# Altium PCB SH-C30A-V1.21.PcbDoc
Units mil, origin at the board's own origin, x right, y up, seen from the top; angles counter-clockwise.
Board outline 3227.33 x 1515.75 mil, 2 copper layers (Top Layer, Bottom Layer), stack 62.206 mil thick; 33 components, 25 nets, 132 pads, 54 vias.
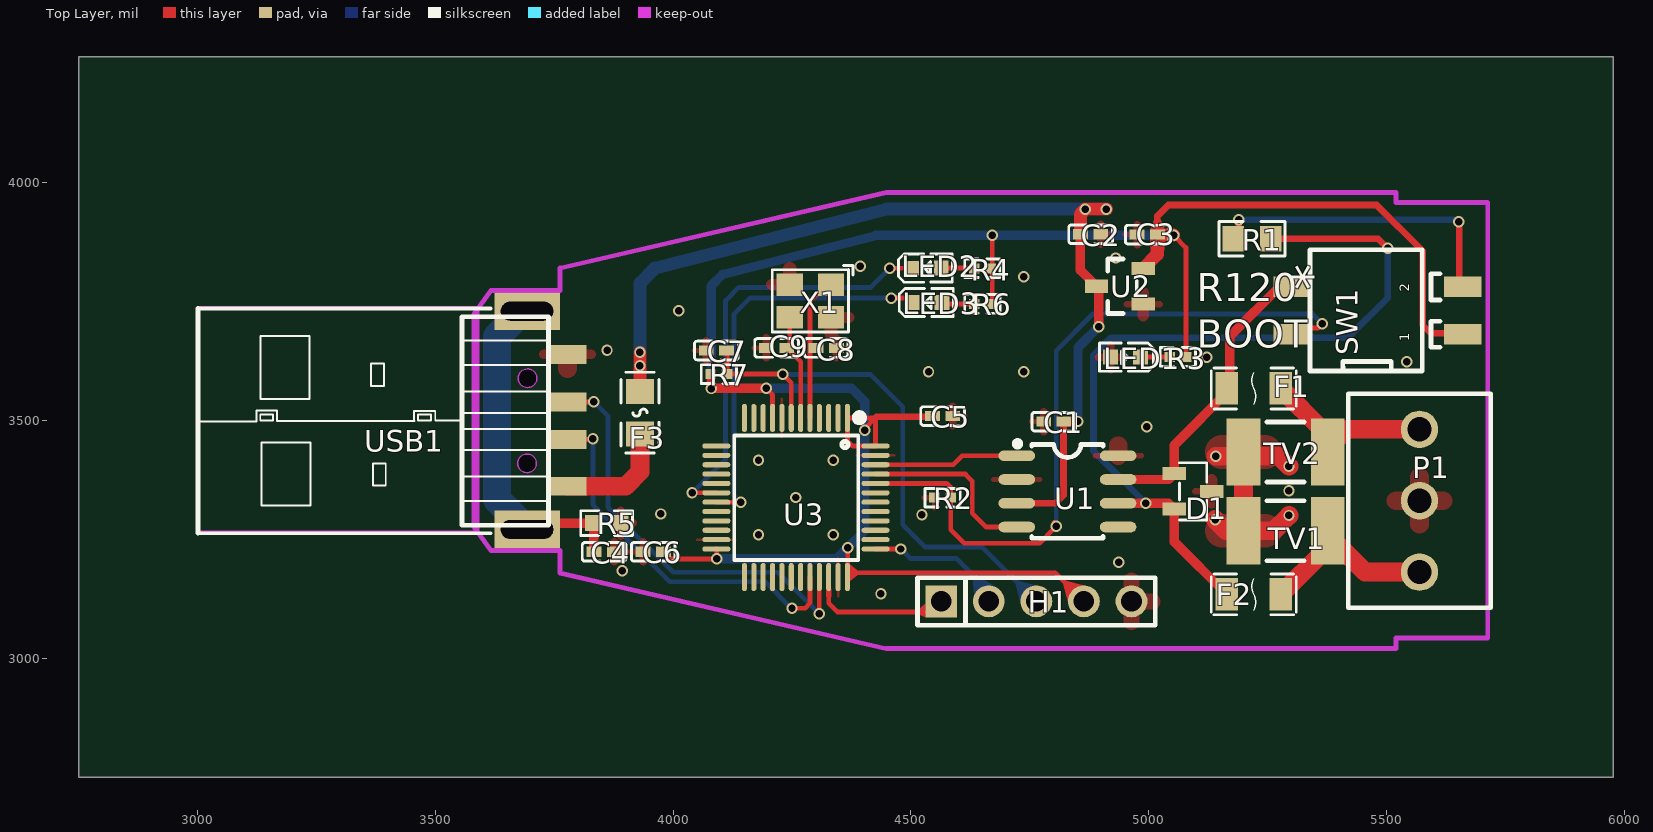
[diagram p0: Top Layer view]
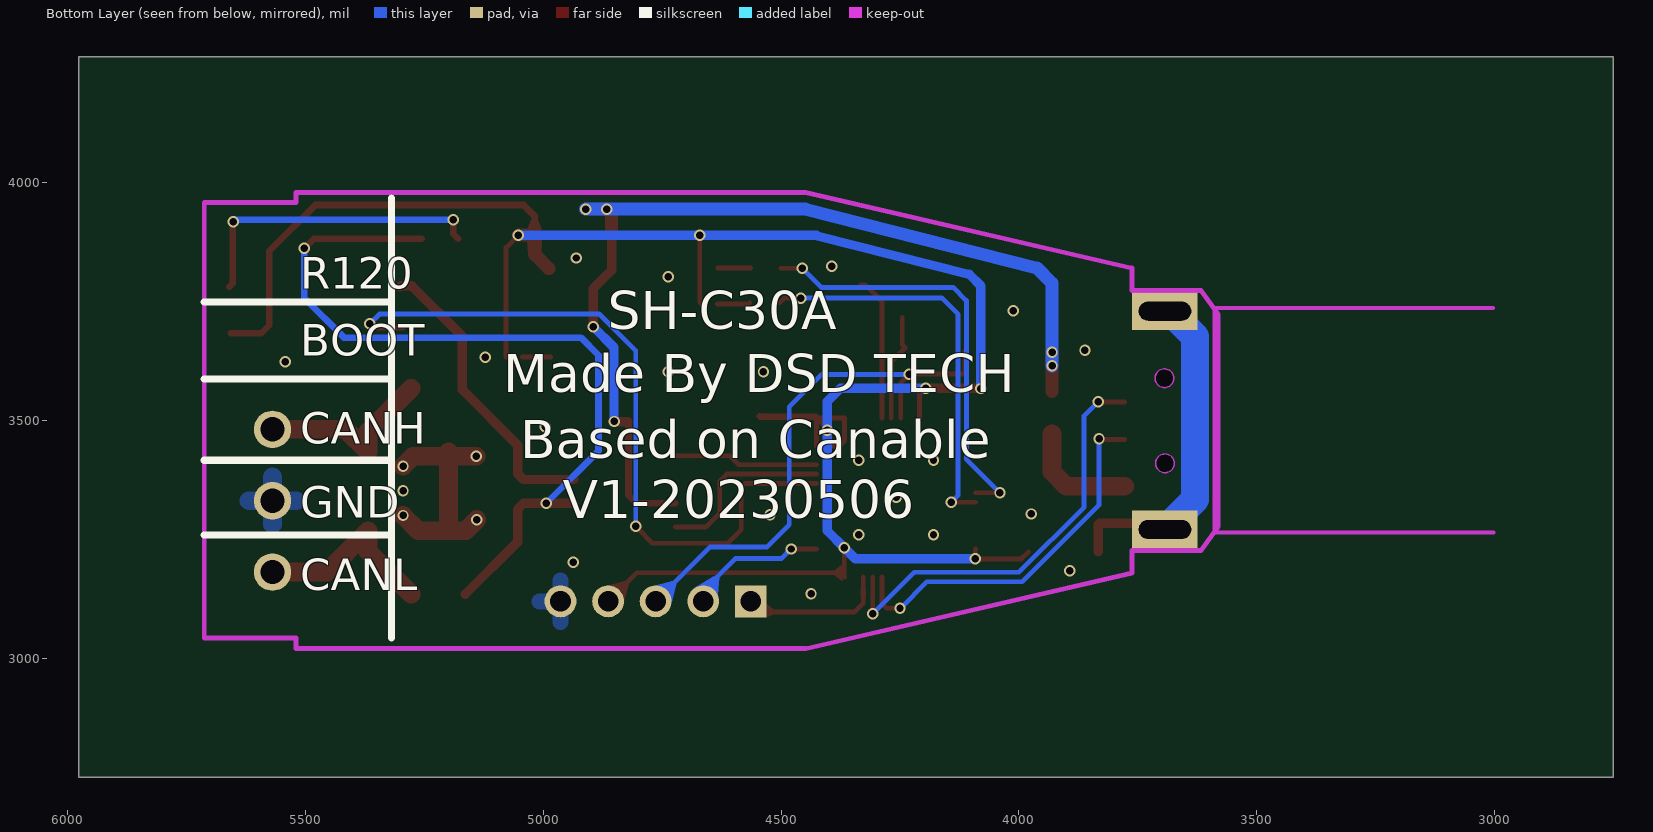
[diagram p1: Bottom Layer view, seen from below]

## Layer stack, top to bottom
Top Solder Mask Layer: solder mask 0.394, Dk 3.3
Top Layer: signal copper 1.379
Dielectric1: surface 59.449, FR4, Dk 4.5
Bottom Layer: signal copper 1.378
Bottom Solder Mask Layer: solder mask 0.394, Dk 3.3

## Board outline
5977.33,2750 2750,2750 2750,4265.75 5977.33,4265.75

## Design rules (kind name [scope] priority, off if disabled: settings)
BoardOutlineClearance Default [All] p0: genericclearance=10 ignorepadtopadclearanceinfootprint=FALSE except(0: Arc-SplitContinuation Track-SplitContinuation SMDPad-SplitContinuation THPad-SplitContinuation Via-SplitContinuation Fill-SplitContinuation Poly-SplitContinuation Region-SplitContinuation Text-SplitContinuation)
BoardOutlineClearance Plane_Default [All] p0: genericclearance=10 ignorepadtopadclearanceinfootprint=FALSE except(0: Arc-SplitContinuation Track-SplitContinuation SMDPad-SplitContinuation THPad-SplitContinuation Via-SplitContinuation Fill-SplitContinuation Poly-SplitContinuation Region-SplitContinuation Text-SplitContinuation)
BoardOutlineClearance Copper_gge7917 [All] p0: genericclearance=10 ignorepadtopadclearanceinfootprint=FALSE except(0: Arc-SplitContinuation Track-SplitContinuation SMDPad-SplitContinuation THPad-SplitContinuation Via-SplitContinuation Fill-SplitContinuation Poly-SplitContinuation Region-SplitContinuation Text-SplitContinuation)
BoardOutlineClearance Copper_gge7914 [All] p0: genericclearance=10 ignorepadtopadclearanceinfootprint=FALSE except(0: Arc-SplitContinuation Track-SplitContinuation SMDPad-SplitContinuation THPad-SplitContinuation Via-SplitContinuation Fill-SplitContinuation Poly-SplitContinuation Region-SplitContinuation Text-SplitContinuation)
BoardOutlineClearance otherClearance [All] p0: genericclearance=10 ignorepadtopadclearanceinfootprint=FALSE except(0: Arc-SplitContinuation Track-SplitContinuation SMDPad-SplitContinuation THPad-SplitContinuation Via-SplitContinuation Fill-SplitContinuation Poly-SplitContinuation Region-SplitContinuation Text-SplitContinuation)
Clearance Default [All] p1: gap=7 ignorepadtopadclearanceinfootprint=FALSE
Clearance Plane_Default [All] p1: gap=7 ignorepadtopadclearanceinfootprint=FALSE
Clearance Copper_gge7917 [All] p1: gap=7 ignorepadtopadclearanceinfootprint=FALSE
Clearance Copper_gge7914 [All] p1: gap=7 ignorepadtopadclearanceinfootprint=FALSE
Clearance otherClearance [All] p1: gap=7 ignorepadtopadclearanceinfootprint=FALSE
DiffPairsRouting differentialPair [All] p1: maxuncoupledlength=10 minlimit=6 maxlimit=Infinity mostfreqgap=6 toplayer_minwidth=5 toplayer_prefwidth=10 toplayer_maxwidth=100 bottomlayer_minwidth=5 bottomlayer_prefwidth=10 bottomlayer_maxwidth=100
PasteMaskExpansion pasteMaskExpansion [All] p1: expansion=0
PlaneConnect Default [All] p1: planeconnectstyle=Relief reliefexpansion=20 reliefentries=4 reliefconductorwidth=0 reliefairgap=10
PolygonConnect gge7917 [All] p1: connectstyle=Direct reliefentries=4 reliefconductorwidth=10 polygonreliefangle="90 Angle" airgapwidth=10
PolygonConnect gge7914 [All] p1: connectstyle=Relief reliefentries=4 reliefconductorwidth=0 polygonreliefangle="90 Angle" airgapwidth=10
RoutingVias Default [All] p1: viastyle="Through Hole" holewidth=12 minholewidth=12 maxholewidth=2362 width=12 minwidth=12 maxwidth=2362
SolderMaskExpansion solderMaskExpansion [IsVia] p1: useseparateexpansions=TRUE expansion=-1000 expansionbottom=-1000
SolderMaskExpansion solderMaskExpansion [All] p2: useseparateexpansions=TRUE expansion=4 expansionbottom=4
Width Default [All] p1: maxlimit=1000 minlimit=10 preferedwidth=10

## Components (designator, comment, footprint, x,y, rotation, side; value= is the part's Value field where it differs from the comment)
C1 "" C0402 4800.75,3498.03 r0 top
C2 "" C0402 4877.92,3892.12 r180 top
C3 "" C0402 4997.01,3891.33 r0 top
C4 "" C0402 3855.08,3224.41 r180 top
C5 "" C0402 4566.7,3509.84 r180 top
C6 "" C0402 3958.43,3224.41 r0 top
C7 "" C0402 4091.11,3647.63 r0 top
C8 "" C0402 4322.02,3653.15 r0 top
C9 "" C0402 4217.68,3653.15 r0 top
D1 "" SOT-23-3_L2.9-W1.3-P1.90-LS2.4-BR 5093.47,3351.49 r180 top locked
F1 "" F1206 5221.03,3568.03 r0 top
F2 "" F1206 5221.03,3134.96 r0 top
F3 "" F0805 3930.48,3516.93 r90 top
H1 "" HDR-TH_5P-P2.54-V-M 4763.94,3120.08 r0 top
LED1 "" LED0603-RD_RED 4951.74,3633.86 r180 top
LED2 "" LED0603-RD 4532.47,3820.73 r0 top
LED3 "" LED0603-RD 4534.42,3748.42 r0 top
P1 "" CONN-TH_3P-P3.81_WJ124-3.81-3P 5569.45,3331.81 r0 top
R1 "" R0805 5217.24,3882.67 r180 top
R2 "" R0402 4566.7,3338.19 r0 top
R3 "" R0402 5061.47,3634.25 r180 top
R4 "" R0402 4650.56,3820.47 r180 top
R5 "" R0603 3860.4,3284.64 r180 top
R6 "" R0402 4650.67,3745.67 r180 top
R7 "" R0402 4096.34,3598.03 r180 top
SW1 "" SW-SMD_4P-L6.5-W6.0-P2.54-LS9.8 5480.87,3731.89 r90 top locked
TV1 "" DIO-DT-SMD_L4.5-W3.2 5287.96,3268.82 r180 top
TV2 "" DIO-DT-SMD_L4.5-W3.2 5287.96,3434.17 r180 top
U1 "" SOIC-8_L5.0-W4.0-P1.27-LS6.0-BL 4829.3,3351.49 r270 top locked
U2 "ME6209A33M3G" SOT-23(SOT-23-3) 4939.53,3782.67 r90 top
U3 "" LQFP-48_L7.0-W7.0-P0.50-LS9.0-BL 4258.43,3338.58 r180 top locked
USB1 "" USB-A-SMD_U-G-04WS-W-01 3735.6,3500.9 r180 top locked
X1 "" OSC-SMD_4P-L3.2-W2.5-BL 4288.75,3751.57 r180 top locked

## Footprints (in the part's own frame and the unit in brackets; to place one, negate y for a bottom-side part, rotate by r counter-clockwise, add the part's x,y. Pads: shape width x height; smd on the part's side, far side on the other; paste and mask are expansions set on the pad)
C0402 [mm]
  rect 0.79x0.54 smd paste-100 mask+0.051: 1(-0.545,0) 2(0.545,0)
  silkscreen extent -1.17,-0.5 1.17,0.5
CONN-TH_3P-P3.81_WJ124-3.81-3P [mil]
  round 78.7 hole 51.2 paste+0 mask+2: 1(0,150) 2(0,0) 3(0,-150)
  silkscreen extent -150,-225 150,225
DIO-DT-SMD_L4.5-W3.2 [mil]
  rect 70.9x141.7 smd paste+0 mask+2: 1(-88.6,0) 2(88.6,0)
  silkscreen extent -39,-63 39,63
F0805 [mm]
  rect 1.335x1.5 smd paste-100 mask+0.051: 1(-1.142,0) 2(1.142,0)
  silkscreen extent -2.16,-1.02 2.16,1.02
F1206 [mil]
  rect 46.9x68 smd paste+0 mask+2: 1(-56.9,0) 2(56.9,0)
  silkscreen extent -89,-43 89,43
HDR-TH_5P-P2.54-V-M [mm]
  rect 1.7x1.7 hole 1.1 paste+0 mask+0.051: 1(-5.08,0)
  round 1.7 hole 1.1 paste+0 mask+0.051: 2(-2.54,0) 3(0,0) 4(2.54,0) 5(5.08,0)
  silkscreen extent -6.35,-1.27 6.35,1.27
LED0603-RD [mm]
  rect 0.8x0.8 smd paste+0 mask+0.051: 1(-0.799,-0.003) 2(0.799,0.003)
  silkscreen extent -1.49,-0.75 1.39,0.76
LED0603-RD_RED [mm]
  rect 0.8x0.8 smd paste+0 mask+0.051: 1(-0.8,-0.003) 2(0.8,0.003)
  silkscreen extent -1.49,-0.75 1.39,0.76
LQFP-48_L7.0-W7.0-P0.50-LS9.0-BL [mm]
  oval 0.27x1.5 smd paste+0 mask+0.05: 1(-2.75,-4.25) 2(-2.25,-4.25) 3(-1.75,-4.25) 4(-1.25,-4.25) 5(-0.75,-4.25) 6(-0.25,-4.25) 7(0.25,-4.25) 8(0.75,-4.25) 9(1.25,-4.25) 10(1.75,-4.25) 11(2.25,-4.25) 12(2.75,-4.25) 25(2.75,4.25) 26(2.25,4.25) 27(1.75,4.25) 28(1.25,4.25) 29(0.75,4.25) 30(0.25,4.25) 31(-0.25,4.25) 32(-0.75,4.25) 33(-1.25,4.25) 34(-1.75,4.25) 35(-2.25,4.25) 36(-2.75,4.25)
  oval 1.5x0.27 smd paste+0 mask+0.05: 13(4.25,-2.75) 14(4.25,-2.25) 15(4.25,-1.75) 16(4.25,-1.25) 17(4.25,-0.75) 18(4.25,-0.25) 19(4.25,0.25) 20(4.25,0.75) 21(4.25,1.25) 22(4.25,1.75) 23(4.25,2.25) 24(4.25,2.75) 37(-4.25,2.75) 38(-4.25,2.25) 39(-4.25,1.75) 40(-4.25,1.25) 41(-4.25,0.75) 42(-4.25,0.25) 43(-4.25,-0.25) 44(-4.25,-0.75) 45(-4.25,-1.25) 46(-4.25,-1.75) 47(-4.25,-2.25) 48(-4.25,-2.75)
  silkscreen extent -3.59,-4.46 3.3,3.34
OSC-SMD_4P-L3.2-W2.5-BL [mm]
  rect 1.4x1.2 smd paste+0 mask+0.051: 1(-1.1,-0.875) 2(1.1,-0.875) 3(1.1,0.875) 4(-1.1,0.875)
  silkscreen extent -2.29,-1.9 2.03,1.65
R0402 [mm]
  rect 0.566x0.54 smd paste-100 mask+0.051: 1(-0.433,0) 2(0.433,0)
  silkscreen extent -0.94,-0.5 0.94,0.5
R0603 [mil]
  rect 31.75x34.02 smd paste-3937.01 mask+2: 1(-29.66,0) 2(29.66,0)
  silkscreen extent -55,-26 55,26
R0805 [mm]
  rect 1.133x1.377 smd paste-100 mask+0.051: 1(-1,0) 2(1,0)
  silkscreen extent -1.76,-0.92 1.76,0.92
SOIC-8_L5.0-W4.0-P1.27-LS6.0-BL [mil]
  oval 22.38x76.78 smd paste+0 mask+2: 1(-75,-106.5) 2(-25,-106.5) 3(25,-106.5) 4(75,-106.5) 5(75,106.5) 6(25,106.5) 7(-25,106.5) 8(-75,106.5)
  silkscreen extent -106,-111 98,75
SOT-23(SOT-23-3) [mm]
  rect 0.7x1.25 smd paste+0 mask+0.102: 1(-0.95,-1.25) 2(0.95,-1.25) 3(0,1.25)
  silkscreen extent -1.46,-0.9 1.46,0.65
SOT-23-3_L2.9-W1.3-P1.90-LS2.4-BR [mm]
  rect 1.25x0.7 smd paste+0 mask+0.051: 1(1,-0.95) 2(1,0.95) 3(-1,0)
  silkscreen extent -0.73,-1.53 0.73,1.53
SW-SMD_4P-L6.5-W6.0-P2.54-LS9.8 [mm]
  rect 1.1x2 smd paste+0 mask+0.051: 1(-1.27,-4.55) 2(1.27,-4.55) 3(1.27,4.55) 4(-1.27,4.55)
  silkscreen extent -3.24,-3.35 3.24,3.6
USB-A-SMD_U-G-04WS-W-01 [mm]
  rect 2x1 smd paste-100 mask+0.051: 1(-1.082,3.518) 2(-1.082,1.029) 3(-1.082,-0.978) 4(-1.082,-3.518)
  rect 3.5x2 hole 1 slot 2.8 at 0 deg paste+0 mask+0.051: 5(1.082,5.829) 6(1.082,-5.829)
  Board Outline Layer circle w0.003: c1.082,2.299 r0.5
  Board Outline Layer circle w0.003: c1.057,-2.248 r0.5
  Board Outline Layer lines w0.2: 18.625,5.994 3.715,5.994 3.715,-5.994 18.599,-5.994
  Board Outline Layer region: 0.582,2.299 0.631,2.516 0.77,2.69 0.971,2.786 1.193,2.786 1.394,2.69 1.532,2.516 1.582,2.299 1.582,2.299 1.532,2.082 1.394,1.908 1.193,1.811 0.971,1.811 0.77,1.908 0.631,2.082 0.582,2.299
  Board Outline Layer region: 0.582,2.299 0.592,2.397 0.62,2.49 0.666,2.577 0.728,2.653 0.804,2.715 0.891,2.761 0.984,2.789 1.082,2.799 1.179,2.789 1.273,2.761 1.36,2.715 1.435,2.653 1.498,2.577 1.544,2.49 1.572,2.397 1.582,2.299 1.572,2.201 1.544,2.108 1.498,2.021 1.435,1.945 1.36,1.883 1.273,1.837 1.179,1.809 1.082,1.799 0.984,1.809 0.891,1.837 0.804,1.883 0.728,1.945 0.666,2.021 0.62,2.108 0.592,2.201
  Board Outline Layer region: 0.557,-2.248 0.606,-2.031 0.745,-1.857 0.945,-1.76 1.168,-1.76 1.368,-1.857 1.507,-2.031 1.557,-2.248 1.557,-2.248 1.507,-2.465 1.368,-2.639 1.168,-2.735 0.945,-2.735 0.745,-2.639 0.606,-2.465 0.557,-2.248
  Board Outline Layer region: 0.557,-2.248 0.566,-2.15 0.595,-2.056 0.641,-1.97 0.703,-1.894 0.779,-1.832 0.865,-1.786 0.959,-1.757 1.057,-1.748 1.154,-1.757 1.248,-1.786 1.334,-1.832 1.41,-1.894 1.472,-1.97 1.518,-2.056 1.547,-2.15 1.557,-2.248 1.547,-2.345 1.518,-2.439 1.472,-2.525 1.41,-2.601 1.334,-2.663 1.248,-2.71 1.154,-2.738 1.057,-2.748 0.959,-2.738 0.865,-2.71 0.779,-2.663 0.703,-2.601 0.641,-2.525 0.595,-2.439 0.566,-2.345
  Multi-Layer board cut-out: 0.582,2.299 0.631,2.516 0.77,2.69 0.971,2.786 1.193,2.786 1.394,2.69 1.532,2.516 1.582,2.299 1.582,2.299 1.532,2.082 1.394,1.908 1.193,1.811 0.971,1.811 0.77,1.908 0.631,2.082 0.582,2.299
  Multi-Layer board cut-out: 0.557,-2.248 0.606,-2.031 0.745,-1.857 0.945,-1.76 1.168,-1.76 1.368,-1.857 1.507,-2.031 1.557,-2.248 1.557,-2.248 1.507,-2.465 1.368,-2.639 1.168,-2.735 0.945,-2.735 0.745,-2.639 0.606,-2.465 0.557,-2.248
  silkscreen extent -0.06,-5.97 18.68,6.03

## Via types
v1: diameter 24.02, hole 15.7, Top Layer to Bottom Layer, 54 vias

## Nets (pads, with @x,y where several pads share a name; then routed paths per layer and width w, separated by ;. In a path a pad name is that pad's centre, name@x,y a point inside that pad or via, vN(x,y) a via of type N, cw(c..) or ccw(c..) an arc to the next point about the centre after c; other vN are vias at no path point)
$3N9456: F1.2 P1.1 TV2.1 | length 392
  Top Layer w39.37: F1.2 5368.68,3477.27 5368.68,3434.17 5416.32,3481.81 P1.1
$3N14841: F3.1 USB1.1 | length 244.2
  Top Layer w39.37: USB1.1 3900.37,3362.4 3930.48,3392.52 F3.1
$3N14842: LED1.1 R3.2 | length 59.4
  Top Layer w10: LED1.1@4985.2,3633.86 5044.04,3633.86 R3.2
$3N14843: LED2.2 R4.2 | length 69.7
  Top Layer w10: LED2.2 4633.13,3820.86 R4.2
$3N14844: LED3.2 R6.2 | length 68.9
  Top Layer w10: LED3.2 4568.78,3745.67 R6.2
$3N18645: C4.2 R5.2 USB1.5 USB1.6 | length 721.8
  Top Layer w19.68: USB1.5 3706.26,3284.64 R5.2 3833.62,3281.76 C4.2
  Bottom Layer w59.06: USB1.5 3629.69,3334.73 3629.69,3676.77 3683.33,3730.4 USB1.6
$3N22964: C9.2 U3.6 X1.3 | length 225.9
  Top Layer w10: X1.3 4245.44,3659.44 C9.2 4268.27,3624.02 U3.6
$3N23449: C8.1 U3.5 X1.1 | length 303.6
  Top Layer w10: U3.5 4287.96,3750.79 4323.2,3786.02 X1.1
$3N28180: F2.2 P1.3 TV1.1 | length 408.3
  Top Layer w39.37: F2.2 5368.68,3225.71 5368.68,3268.82 5455.69,3181.81 P1.3
$3N29005: R1.2 SW1.2 | length 656.1
  Top Layer w13.78: R1.2@5179.2,3882.67 5189.53,3893.01 v1(5189.53,3922.44) ; SW1.2 5652.92,3788.97 v1@5652.92,3918.11 ; v1@5652.92,3918.11 5652.13,3918.89 5652.92,3919.68 v1@5652.92,3918.11
  Bottom Layer w13.78: v1(5189.53,3922.44) v1@5652.53,3922.44 ; v1@5647.8,3922.44 v1(5652.13,3918.11)
+3V3: C3.2 C5.2 C6.2 H1.4 R3.1 R4.1 R6.1 R7.2 SW1.1 U2.2 U3.1 U3.9 U3.24 U3.36 U3.48 | length 4780.4
  Top Layer w10: C6.2 3994.85,3209.45 v1(4091.9,3209.45) 4091.9,3229.53 U3.24 ; v1(4195.84,3568.11) 4209.22,3554.72 U3.9 ; U3.36 4367.09,3171.65 U3.36@4367.09,3180.06 ; v1(4367.09,3232.67) U3.36@4367.09,3180.06 ; v1(4402.92,3479.92) 4402.92,3483.47 4425.35,3505.9 ; R6.1 4670.99,3748.95 v1(4670.99,3890.15) ; H1.4 4803.71,3180.31 4367.35,3180.31 U3.36@4367.09,3180.06 ; v1(5052.53,3890.15) 5078.51,3864.17 R3.1 ; 4425.35,3505.9 4425.75,3506.3 U3.48 4377.94,3446.85 4366.7,3458.08 U3.1 4425.35,3505.9
  Top Layer w13.78: 4427.72,3508.66 4544.06,3508.66 C5.2 ; C3.2@5018.47,3890.15 5018.47,3930.51 5041.5,3953.54 5479.3,3953.54 5576.15,3856.69 5576.15,3700.78 5593.08,3683.86 SW1.1@5656.86,3683.86
  Top Layer w19.68: v1(4195.84,3568.11) 4079.69,3568.11 R7.2@4079.69,3593.3 ; R7.2@4079.69,3593.3 4079.3,3593.7 4079.69,3598.03 R7.2@4079.69,3593.3
  Top Layer w27.56: U2.2 5018.47,3849.81 5018.47,3890.15 v1(5052.53,3890.15)
  Bottom Layer w19.68: v1(4080.09,3567.71) 4080.09,3783.46 4104.5,3807.87 4424.18,3888.58 4425.76,3890.15 v1(4670.99,3890.15) v1(5052.53,3890.15) ; v1(4091.9,3209.45) 4343.87,3209.45 v1(4367.09,3232.67) 4402.92,3268.5 v1(4402.92,3479.92) 4402.92,3540.55 4375.36,3568.11 v1(4195.84,3568.11)
+5V: C1.2 C2.2 F3.2 U1.3 U2.3 | length 2084
  Top Layer w13.78: U1.3 4804.22,3326.49 4821.03,3343.3 4821.03,3494.49 4823.39,3496.85 C1.2
  Top Layer w19.68: C1.2 4850.95,3498.03 v1(4851.35,3498.42) ; C2.2 4856.46,3816.55 U2.3 4895.05,3777.96 v1(4895.05,3697.63)
  Top Layer w27.56: F3.2 v1(3930.48,3615.35) v1(3930.48,3643.7) ; C2.2 4856.46,3934.56 v1(4866.7,3944.8) v1(4910.79,3944.8)
  Bottom Layer w19.68: v1(4851.35,3498.42) 4851.35,3653.93 v1(4895.05,3697.63)
  Bottom Layer w27.56: v1(3930.48,3615.35) v1(3930.48,3643.7) 3930.48,3789.18 3961.79,3820.5 4448.98,3944.79 v1(4866.7,3944.8) v1(4910.79,3944.8)
BOOT0: R2.2 SW1.4 U3.44 | length 1561.8
  Top Layer w10: U3.44 4575.36,3368.11 4583.74,3359.73 R2.2 4583.74,3270.75 4611.98,3242.52 4770.64,3242.52 4799.57,3271.45 v1@4799.57,3279.33 ; v1@4800.95,3280.31 v1@4800.95,3280.71 ; v1@4800.95,3286.61 v1@4800.95,3280.71 ; v1@4805.48,3285.23 v1@4800.95,3280.71 ; v1(4805.68,3278.34) 4804.69,3279.33 v1@4799.57,3279.33 ; SW1.4@5295.05,3694.88 5356.46,3694.88 v1(5365.12,3703.54) ; v1@4799.57,3279.33 v1@4800.95,3280.71
  Bottom Layer w10: v1(4805.68,3278.34) 4805.68,3647.63 4882.45,3724.41 5344.26,3724.41 v1(5365.12,3703.54)
CAN_RXD: U1.4 U3.45 | length 382.8
  Top Layer w10: U3.45 4614.73,3387.79 4629.3,3373.23 4629.3,3305.51 4658.31,3276.49 U1.4
CAN_TXD: U1.1 U3.46 | length 304.9
  Top Layer w10: U3.46 4588.75,3407.48 4607.76,3426.49 U1.1
GND: C1.1 C2.1 C3.1 C4.1 C5.1 C6.1 C7.1 C8.2 C9.1 D1.3 H1.5 LED1.2 P1.2 R2.1 R5.1 TV1.2 TV2.2 U1.2 U1.8 U2.1 U3.8 U3.23 U3.35 U3.47 USB1.4 X1.2 X1.4 | length 505.9
  Top Layer w39.37: v1(5139.93,3292.12) 5163.23,3268.82 TV1.2 ; v1(5141.11,3425.19) TV2.2@5199.36,3425.19 ; TV2.2 TV2.2@5199.36,3425.19 ; v1(5295.05,3300.78) 5263.08,3268.82 TV1.2 ; v1(5295.05,3404.33) 5274.18,3425.19 TV2.2@5199.36,3425.19 ; TV1.2 TV2.2@5199.36,3425.19
  other v1: 4437.17,3135.82 3893.08,3184.64 4937.17,3202.76 4179.69,3259.84 4337.17,3259.84 4523.39,3302.36 3974.18,3303.93 4258.43,3338.58 5295.05,3352.56 4179.7,3417.32 4337.17,3417.32 4996.23,3487.4 4537.17,3602.76 4737.17,3602.76 5543.08,3624.41 5122.61,3633.86 3861.19,3648.42 4011.98,3731.1 4737.17,3802.76 4393.87,3825.19 4930.48,3842.12
JL-SWCLK: H1.2 U3.37 | length 298
  Top Layer w10: U3.37 v1(4478.91,3230.31) ; v1(4478.91,3230.31) 4479.3,3230.31 v1(4478.91,3230.31)
  Bottom Layer w10: v1(4478.91,3230.31) 4479.3,3230.31 4499.38,3210.23 4596.62,3210.23 4663.94,3142.91 H1.2
JL-SWDIO: H1.1 U3.34 | length 308.4
  Top Layer w10: U3.34 4327.33,3116.14 4345.44,3098.03 4541.9,3098.03 H1.1
LED1: LED2.1 U3.18 | length 903.4
  Top Layer w10: v1(4039.93,3348.42) U3.18 ; v1(4456.07,3820.47) 4500.87,3820.47 LED2.1
  Bottom Layer w10: v1(4039.93,3348.42) 4110.4,3418.9 4110.4,3752.75 4137.94,3780.29 4415.89,3780.29 v1(4456.07,3820.47)
LED2: LED3.1 U3.19 | length 845.7
  Top Layer w10: U3.19 v1(4142.29,3328.74) ; v1(4459.22,3757.87) 4493.36,3757.87 LED3.1
  Bottom Layer w10: v1(4142.29,3328.74) 4128.12,3342.91 4128.12,3724.01 4162.37,3758.26 4459.22,3758.26 v1(4459.22,3757.87)
NRST: C7.2 H1.3 R7.1 U3.7 | length 1142.9
  Top Layer w10: C7.2 4113.38,3646.83 4113.38,3598.42 4230.08,3598.42 4248.59,3579.91 U3.7
  Bottom Layer w10: v1(4230.48,3598.03) 4231.27,3597.24 4414.73,3597.24 4482.84,3529.13 4482.84,3281.49 4529.69,3234.64 4649.38,3234.64 H1.3
UCAN_H: D1.1 F1.1 SW1.3 U1.7 | length 636
  Top Layer w19.68: U1.7 5041.7,3376.49 D1.1 5054.1,3448.82 5170.24,3564.96 5170.24,3677.16 5276.54,3783.46 5300.17,3783.46 SW1.3
UCAN_L: D1.2 F2.1 R1.1 U1.6 | length 1733.5
  Top Layer w13.78: R1.1@5255.28,3882.67 5482.45,3882.67 v1(5502.53,3862.59)
  Top Layer w19.68: U1.6 v1(4993.98,3326.49) 5041.7,3326.49 D1.2 5054.1,3244.99 F2.1
  Bottom Layer w13.78: v1(4993.98,3326.49) 4884.02,3436.45 4884.02,3637.79 4921.03,3674.8 5419.45,3674.8 5502.53,3757.87 v1(5502.53,3862.59)
USBDM: U3.32 USB1.2 | length 798.5
  Top Layer w10: USB1.2 3830.26,3460.4 v1(3831.66,3461.81) ; v1(4250.14,3105.92) 4277.74,3105.92 4287.96,3116.14 U3.32
  Bottom Layer w10: v1(3831.66,3461.81) 3831.66,3322.83 3993.08,3161.42 4193.47,3161.42 4248.97,3105.92 v1(4250.14,3105.92)
USBDP: U3.33 USB1.3 | length 904.6
  Top Layer w10: USB1.3 3832.49,3539.4 v1(3833.24,3540.15) ; U3.33 4307.64,3093.93 v1(4307.76,3093.81)
  Bottom Layer w10: v1(3833.24,3540.15) 3863.16,3510.23 3863.16,3318.5 4000.17,3181.49 4220.08,3181.49 v1(4307.76,3093.81)
pads on no net: U1.5 U3.2 U3.3 U3.4 U3.10 U3.11 U3.12 U3.13 U3.14 U3.15 U3.16 U3.17 U3.20 U3.21 U3.22 U3.25 U3.26 U3.27 U3.28 U3.29 U3.30 U3.31 U3.38 U3.39 U3.40 U3.41 U3.42 U3.43

## Polygon pours and split planes (outlines as drawn)
+3V3 on Top Layer (solid, remove dead copper, pour order 0): 4366.7,3531.49 4366.7,3446.84 4455.28,3446.84 4455.28,3531.49
GND on Top Layer (solid, remove dead copper, pour order 2): 3537.17,3990.94 3537.17,3003.94 5712.76,3003.94 5712.76,3990.94
GND on Bottom Layer (solid, remove dead copper, pour order 4): 3576.15,4015.75 3576.15,3000 5727.33,3000 5727.33,4015.75

## Keep-outs
Board Outline Layer:
  lines w10: 3581.16,3401.91 3581.16,3723.91 3617.16,3773.91 3762.16,3773.91 3762.16,3820.91 4448.16,3979.91 4484.16,3979.91 5520.16,3979.91 5520.16,3958.91 5713.16,3958.91 5713.16,3042.91 5520.16,3042.91 5520.16,3020.91 4448.16,3020.91 ; 3581.16,3598.91 3581.16,3276.91 3617.16,3226.91 3762.16,3226.91 3762.16,3179.91 4448.16,3020.91 ; 4484.16,3020.91 4448.16,3020.91

## Other copper
Top Layer:
  region net JL-SWDIO: 4515.48,3103.03 4515.48,3093.03 4530.48,3086.61 4530.48,3115.53
  region net JL-SWDIO: 4332.33,3130.24 4332.65,3147.05 4322.02,3147.05 4322.33,3130.24
  region net +3V3: 4387.02,3175.31 4387.02,3185.31 4371.48,3197.81 4372.02,3162.81
  region net +3V3: 4866.04,3153.48 4827.25,3163.84 4820.18,3156.77 4830.55,3117.98
  region net +3V3: 5004.7,3849.81 5032.25,3849.81 5034.03,3880.7 5002.92,3880.7
  region net +3V3: 5011.59,3922.63 5002.92,3901.96 5034.03,3901.96 5025.36,3922.63
Bottom Layer:
  region net NRST: 4766.04,3153.48 4727.25,3163.84 4720.18,3156.77 4730.55,3117.98
  region net JL-SWCLK: 4681.9,3148.32 4641.21,3172.72 4630.24,3169.54 4633.68,3134.36

## Silkscreen, mask and mechanical layers (free items; w line width, h text height)
Top Silkscreen Layer:
  text "R120" at 5100.95,3751.57 h59.06
  text "BOOT" at 5100.95,3653.15 h59.06
Bottom Silkscreen Layer:
  lines w15: 5319.45,3042.91 5319.45,3968.11 ; 5319.45,3259.45 5713.16,3259.45 ; 5319.45,3416.93 5713.16,3416.93 ; 5319.45,3587.91 5713.16,3587.91 ; 5319.45,3749.84 5713.16,3749.84
  text "R120" at 5511.45,3777.16 h66.93
  text "SH-C30A" at 4864.73,3692.52 h79.92
  text "BOOT" at 5511.45,3637 h66.93
  text "Made By DSD TECH" at 5084.42,3560.23 h79.92
  text "CANH" at 5511.45,3451.97 h66.93
  text "Based on Canable" at 5048.2,3420.86 h79.92
  text "GND" at 5511.45,3295.67 h66.93
  text "V1-20230506" at 4959.22,3295.27 h79.92
  text "CANL" at 5511.45,3143.3 h66.93

## Text inside footprints (layer, text, board x,y; h text height)
SW1: Top Silkscreen Layer "1" at 5547.79,3666.79 h19.68 r90; Top Silkscreen Layer "*" at 5380.55,3774.43 h80 r90; Top Silkscreen Layer "2" at 5547.48,3771.3 h19.68 r90